# EAGLE board AD 2 (EAGLE 9.6.2)
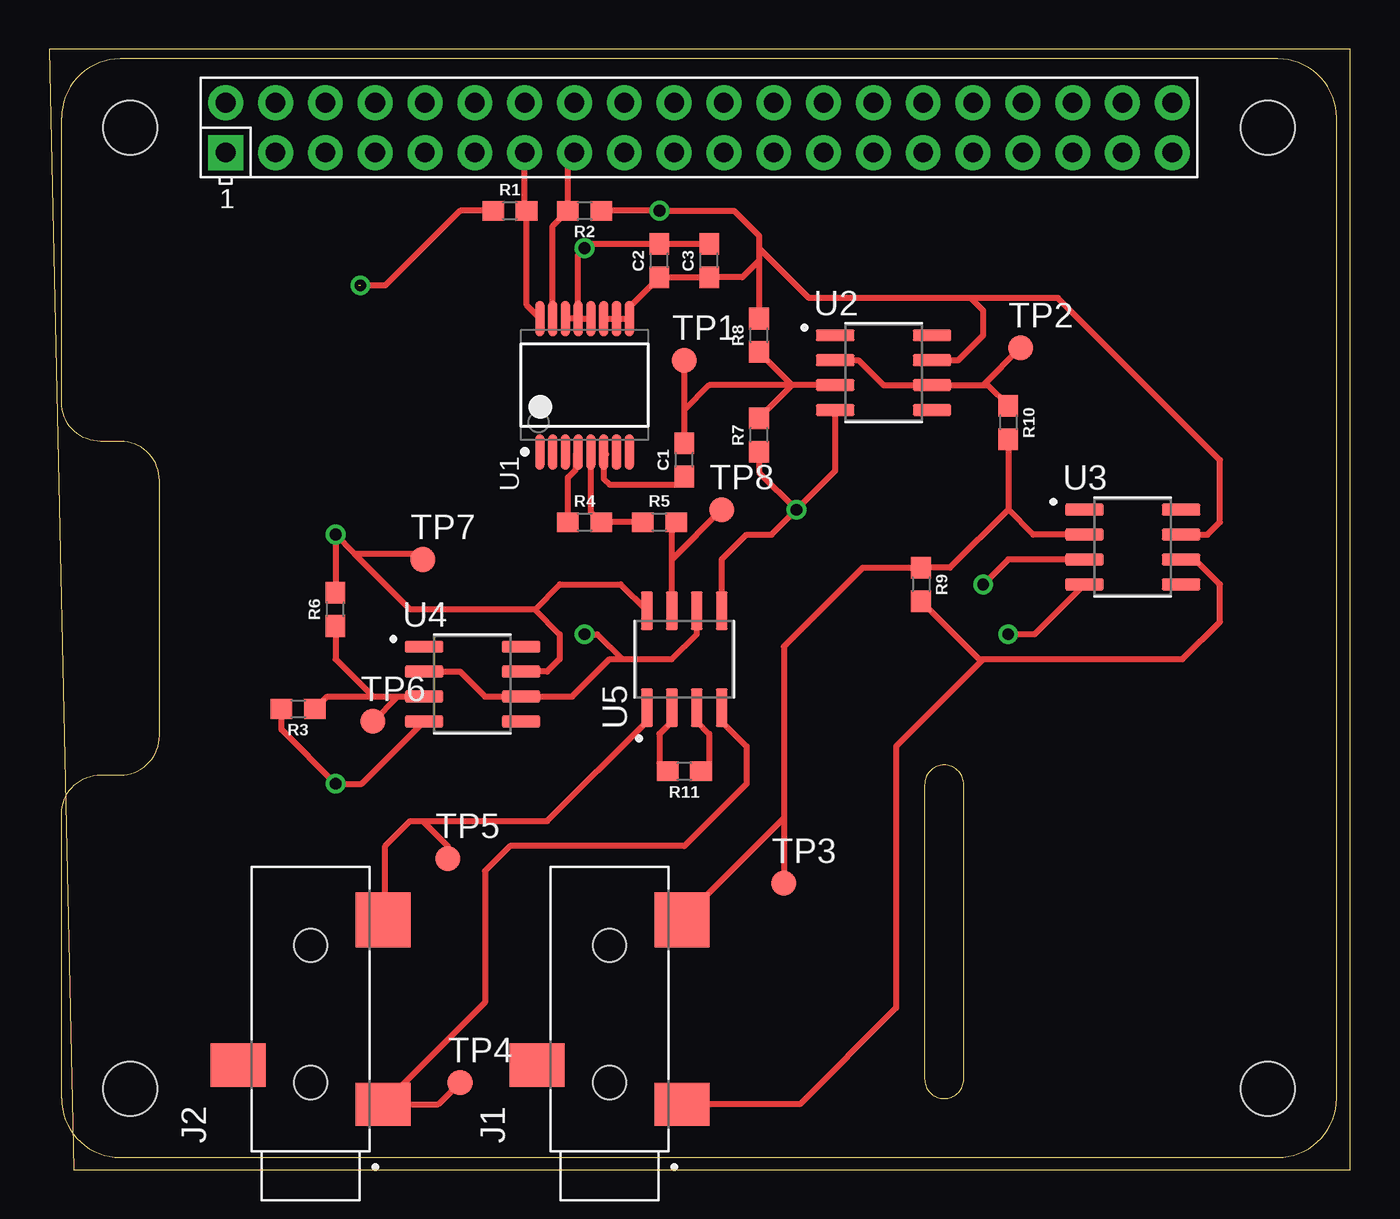
[diagram p0: board, top side]
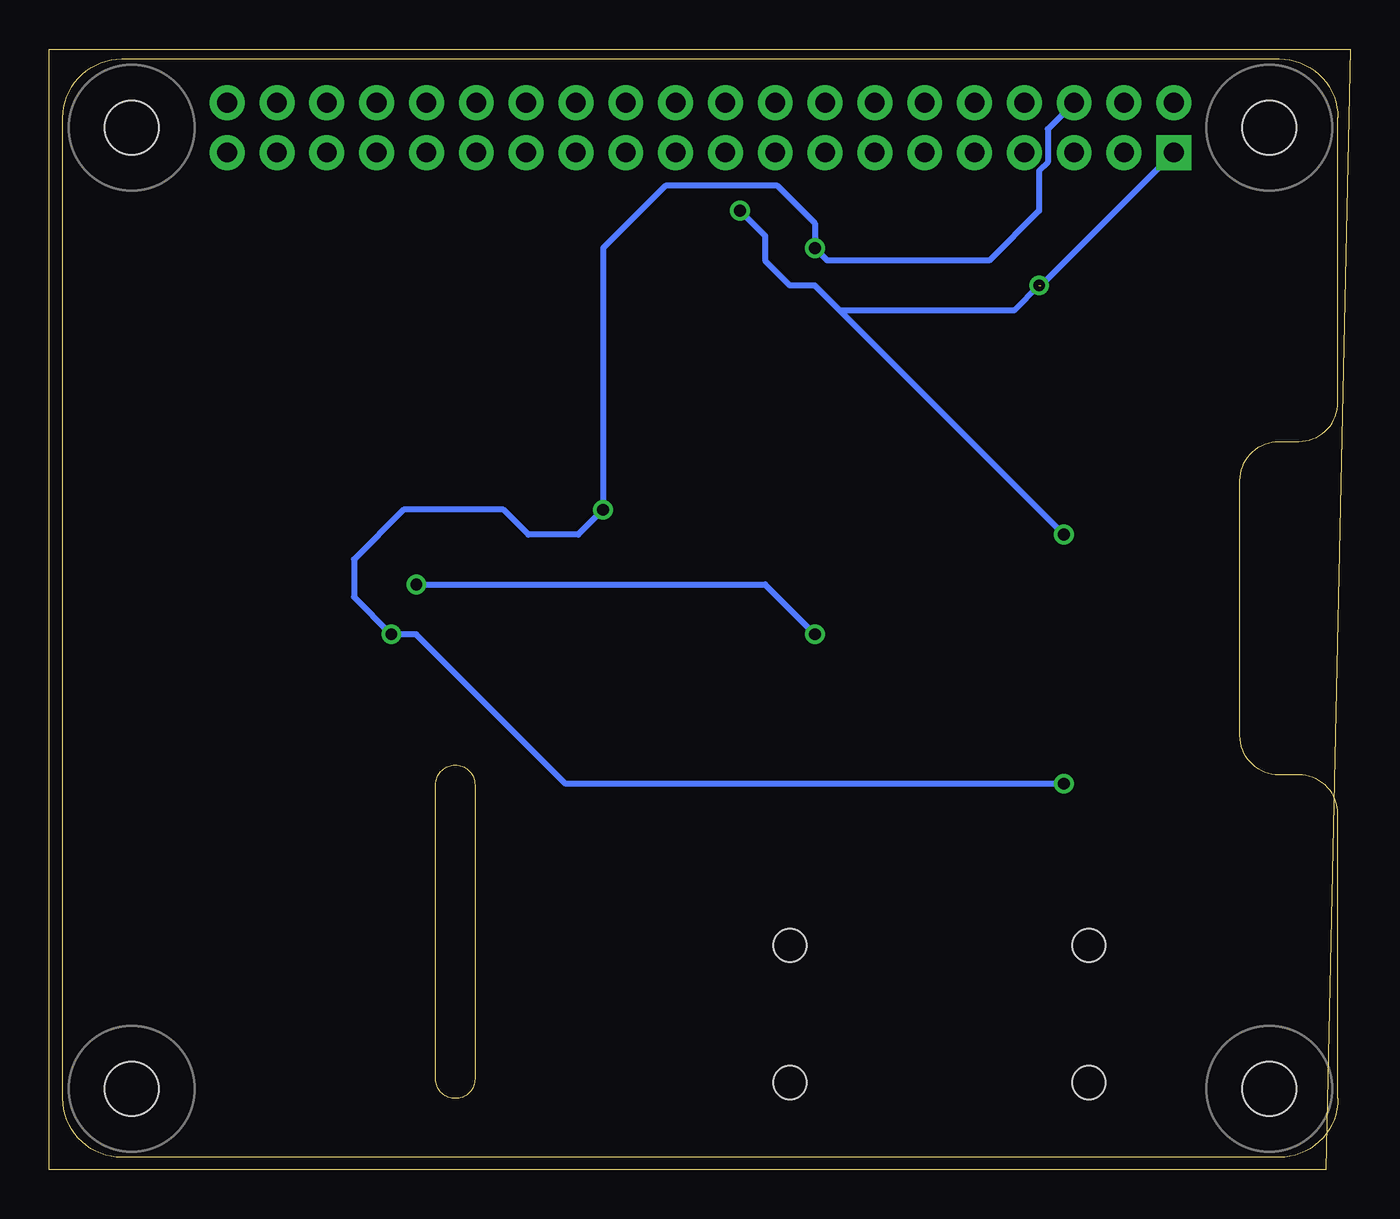
[diagram p1: board, bottom side, seen from below]

Size 66.34 x 57.14 mm. Coordinates in mm from the lower left corner, seen from the top.
Outline: 1.27,0 66.34,0 66.34,57.14 0,57.14 1.27,0
Copper layers (1*16): Top 0.035mm / dielectric 1.5mm / Bottom 0.035mm
Design rules "default": minimum track width 6mil, minimum drill 0.35mm, track to track 6mil, track to pad 6mil, pad to pad 6mil, via to via 6mil, smd to smd 6mil, copper to edge 40mil, drill to drill 6mil, minimum pad ring 10mil, minimum via ring 8mil, stop-mask expansion 4mil, vias tented up to drill 0mil, thermal gap 10mil

## Footprints (pad centres in the part's own frame; a part is rotated, then mirrored left to right if it is on the bottom)
0603 = smd 1.1 x 1: 1 -0.85,0; 2 0.85,0
CUI_SJ-3523-SMT-TR = smd 2.2 x 2.8: 1 -1.1,-3.7; 3 0.9,3.7 | smd 2.8 x 2.8: 2 8.3,-3.7 | hole 1.7: 0,0; 7,0
B1,27 = smd 1.27 x 1.27: TP 0,0
ANALOG_DEVICES_AD5933YRSZ_0 = smd 1.8 x 0.45: 1 -3.4,2.275; 2 -3.4,1.625; 3 -3.4,0.975; 4 -3.4,0.325; 5 -3.4,-0.325; 6 -3.4,-0.975; 7 -3.4,-1.625; 8 -3.4,-2.275; 9 3.4,-2.275; 10 3.4,-1.625; 11 3.4,-0.975; 12 3.4,-0.325; 13 3.4,0.325; 14 3.4,0.975; 15 3.4,1.625; 16 3.4,2.275
SOIC127P599X175-8N = smd 1.97 x 0.6: 1 -2.47,1.905; 2 -2.47,0.635; 3 -2.47,-0.635; 4 -2.47,-1.905; 5 2.47,-1.905; 6 2.47,-0.635; 7 2.47,0.635; 8 2.47,1.905
RASPI_BOARD_B+HAT_DF_CF = drill 1 pad 1.778 square: 1 8.37,51.23 | drill 1 pad 1.778: 2 8.37,53.77; 3 10.91,51.23; 4 10.91,53.77; 5 13.45,51.23; 6 13.45,53.77; 7 15.99,51.23; 8 15.99,53.77; 9 18.53,51.23; 10 18.53,53.77; 11 21.07,51.23; 12 21.07,53.77; 13 23.61,51.23; 14 23.61,53.77; 15 26.15,51.23; 16 26.15,53.77; 17 28.69,51.23; 18 28.69,53.77; 19 31.23,51.23; 20 31.23,53.77; 21 33.77,51.23; 22 33.77,53.77; 23 36.31,51.23; 24 36.31,53.77; 25 38.85,51.23; 26 38.85,53.77; 27 41.39,51.23; 28 41.39,53.77; 29 43.93,51.23; 30 43.93,53.77; 31 46.47,51.23; 32 46.47,53.77; 33 49.01,51.23; 34 49.01,53.77; 35 51.55,51.23; 36 51.55,53.77; 37 54.09,51.23; 38 54.09,53.77; 39 56.63,51.23; 40 56.63,53.77 | hole 2.75: 3.5,3.5; 3.5,52.5; 61.5,3.5; 61.5,52.5

## Placement (x,y rotation side)
C1  10 nF  [0603]  32.38,36.2 90 top
C2  0.1uF  [0603]  31.12,46.35 90 top
C3  10 uF  [0603]  33.66,46.35 90 top
J1  SJ-3523-SMT-TR  [CUI_SJ-3523-SMT-TR]  28.58,4.45 90 top
J2  SJ-3523-SMT-TR  [CUI_SJ-3523-SMT-TR]  13.34,4.45 90 top
R1  4.7 kO  [0603]  23.49,48.89 0 top
R2  4.7 kO  [0603]  27.3,48.89 180 top
R3  1 kO  [0603]  12.7,23.49 180 top
R4  500 O  [0603]  27.3,33.02 0 top
R5  1 kO  [0603]  31.12,33.02 0 top
R6  1 kO  [0603]  14.61,28.58 90 top
R7  100 kO  [0603]  36.2,37.47 90 top
R8  100 kO  [0603]  36.2,42.55 90 top
R9  1 MO  [0603]  44.45,29.84 270 top
R10  80 kO  [0603]  48.9,38.1 270 top
R11  100 kO  [0603]  32.38,20.32 180 top
TP1  PTR1B1,27  [B1,27]  32.38,41.27 0 top
TP2  PTR1B1,27  [B1,27]  49.53,41.91 0 top
TP3  PTR1B1,27  [B1,27]  37.47,14.61 0 top
TP4  PTR1B1,27  [B1,27]  20.95,4.45 0 top
TP5  PTR1B1,27  [B1,27]  20.32,15.88 0 top
TP6  PTR1B1,27  [B1,27]  16.51,22.86 0 top
TP7  PTR1B1,27  [B1,27]  19.05,31.12 0 top
TP8  PTR1B1,27  [B1,27]  34.29,33.66 0 top
U1  ANALOG_DEVICES_AD5933YRSZANALOG_DEVICES_AD5933YRSZ_0_0  [ANALOG_DEVICES_AD5933YRSZ_0]  27.3,40.01 90 top
U2  OPA330AID  [SOIC127P599X175-8N]  42.55,40.64 0 top
U3  OPA330AID  [SOIC127P599X175-8N]  55.24,31.75 0 top
U4  OPA330AID  [SOIC127P599X175-8N]  21.59,24.77 0 top
U5  INA826AID  [SOIC127P599X175-8N]  32.38,26.03 90 top
X1  RASPI_BOARD_B+_HDC  [RASPI_BOARD_B+HAT_DF_CF]  0.64,0.64 0 top

## Library data of the parts
C1 = SparkFun-Capacitors; PROD_ID: CAP-09633
C2 C3 = SparkFun-Capacitors; PROD_ID: CAP-00810
J1 J2 = SJ-3523-SMT-TR; AVAILABILITY: In Stock; CUI_PURCHASE_URL: https://www.cuidevices.com/product/interconnect/connectors/audio-connectors/jacks/sj-352x-smt-series?utm_source=snapeda.com&utm_medium=referral&utm_campaign=snapedaBOM; DESCRIPTION: 3.5 mm, Stereo, Right Angle, Surface Mount (SMT), 3 Conductors, 0~1 Internal Switches, Audio Jack Connector; MF: CUI Devices; MP: SJ-3523-SMT-TR; PACKAGE: None; PRICE: None; PURCHASE-URL: https://pricing.snapeda.com/search/part/SJ-3523-SMT-TR/?ref=eda
R1-R11 = SparkFun-Resistors; PROD_ID: RES-08283
TP1-TP8 = testpad
U1 = Analog Devices - AD5933YRSZ; CIIVA_IDS: 19299999; CODE__JEDEC: MO-150-AC; COMPONENT_LINK_1_DESCRIPTION: Manufacturer URL; COMPONENT_LINK_1_URL: www.analog.com; COMPONENT_LINK_3_DESCRIPTION: Package Specification; COMPONENT_LINK_3_URL: http://www.analog.com/static/imported-files/packages/31572257652246RS_16.pdf; DATASHEET: http://www.analog.com/static/imported-files/data_sheets/AD5933.pdf; DATASHEET_VERSION: Rev. D; FOOTPRINT_VARIANT_NAME_0: Level C; FOOTPRINT_VARIANT_NAME_1: Level B; FOOTPRINT_VARIANT_NAME_2: Level A; IMPORTED: yes; IMPORTED_FROM: vault; IMPORT_TS: 1521848033; IO_INTERFACE: Serial; I_SUPPLY_TOTAL_MAX: 15mA; MASTER_FCLK: 16.776MHz; MF: Analog Devices; MPN: AD5933YRSZ; PACKAGE: RS-16; PACKAGE_DESCRIPTION: 16-Lead Shrink Small Outline Package [SSOP]; PACKAGE_VERSION: 3/17/2005; PIN_0_0_15_INSIDE_EDGE: clock; PIN_0_0_7_INSIDE_EDGE: clock; PREFIX: U; RELEASE_DATE: 1333437714; RESOLUTION_BITS: 12bit; TUNING_WORD_WIDTH_BITS: 27bit; VAULT_GUID: 12E548FF-7E75-4596-9B3A-06B167E4919E; VAULT_REVISION: 0B288880-7FBC-46A2-8187-17CED40A7223
U2-U4 = OPA330AID; AVAILABILITY: In Stock; DESCRIPTION: Single, 1.8-V, 35-µA, micropower, precision, zero drift CMOS op amp; MF: Texas Instruments; MP: OPA330AID; PACKAGE: SOIC-8 Texas Instruments; PRICE: None; PURCHASE-URL: https://pricing.snapeda.com/search/part/OPA330AID/?ref=eda
U5 = INA826AID; AVAILABILITY: In Stock; DESCRIPTION: Precision, 200-μA Supply Current, 36-V Supply Instrumentation Amplifier; MF: Texas Instruments; MP: INA826AID; PACKAGE: SOIC-8 Texas Instruments; PRICE: None; PURCHASE-URL: https://pricing.snapeda.com/search/part/INA826AID/?ref=eda
X1 = raspberrypi_bastelstube_v13

## Nets
3.3V: C2.1 C3.1 R1.1 R2.1 R6.2 R8.2 TP7.TP U1.9 U1.10 U1.11 U2.7 U3.7 U4.7 U5.8 X1.1
5V0: X1.2
GND: C2.2 C3.2 R3.2 R7.1 U1.12 U1.13 U1.14 U2.4 U3.4 U4.4 U5.5 X1.6
N$1: R11.2 U5.2
N$2: R11.1 U5.3
N$3: C1.1 U1.6
N$4: C1.2 R7.2 R8.1 TP1.TP U2.3
N$5: R10.1 TP2.TP U2.2 U2.6
N$6: J1.2 R9.1 R10.2 TP3.TP U3.2
N$7: J1.1 R9.2 U3.6
N$8: R3.1 R6.1 TP6.TP U4.3
N$9: J2.1 TP4.TP U5.4
N$10: U3.3 U4.2 U4.6 U5.6
N$11: J2.2 TP5.TP U5.1
N$12: R5.2 TP8.TP U5.7
N$14: R4.1 U1.4
SCL: R1.2 U1.16 X1.13
SDA: R2.2 U1.15 X1.15
SIGIN: R4.2 R5.1 U1.5

## Tracks (layer width: path | path; a pad name or v marks a point on that pad's centre or on a via)
3.3V  (via drill 0.6)  (1 unrouted)
  Top 0.305: U1.11 U1.10 U1.9 29.58,43.97 C2.1 C3.1 35.34,45.51 36.2,46.35 | 36.2,46.99 36.2,47.62 34.93,48.89 v31.12,48.89 R2.1 | 36.2,46.99 36.2,46.35 | U2.7 46.35,41.27 47.63,42.55 47.63,43.81 46.99,44.45 | 36.2,46.99 38.73,44.45 46.99,44.45 | 36.2,46.35 R8.2 | U3.7 59.05,32.38 59.69,33.02 59.69,36.2 51.43,44.45 46.99,44.45 | R6.2 v14.61,32.38 15.56,31.43 | U4.7 25.4,25.4 26.04,26.03 26.04,27.3 24.77,28.58 | 24.77,28.58 26.04,29.84 29.14,29.84 U5.8 | 15.56,31.43 18.41,28.58 24.77,28.58 | R1.1 20.95,48.89 17.15,45.09 v15.88,45.09 | 15.56,31.43 18.73,31.43 TP7.TP
  Bottom 0.305: v31.12,48.89 29.84,47.62 29.84,46.35 28.58,45.09 27.3,45.09 26.04,43.81 | 15.79,45.09 X1.1 | v14.61,32.38 26.04,43.81 | v15.88,45.09 17.15,43.81 26.04,43.81
GND  (via drill 0.6)
  Top 0.305: U1.13 U1.14 | U1.13 U1.12 | C3.2 C2.2 27.52,47.2 v27.3,46.99 26.98,46.66 U1.13 | R3.2 11.85,22.44 v14.61,19.69 15.95,19.69 U4.4 | R7.1 36.2,35.56 v38.1,33.66 | U2.4 40.08,35.63 v38.1,33.66 | U5.5 34.29,31.12 35.56,32.38 36.83,32.38 v38.1,33.66 | U3.4 50.24,27.3 v48.9,27.3
  Bottom 0.305: X1.6 15.43,53.06 15.43,51.37 15.88,50.93 15.88,48.89 18.41,46.35 26.67,46.35 v27.3,46.99 27.3,48.26 29.21,50.17 34.93,50.17 38.1,46.99 v38.1,33.66 39.37,32.38 41.91,32.38 43.18,33.66 48.26,33.66 50.8,31.12 50.8,29.21 v48.9,27.3 47.63,27.3 40.01,19.69 v14.61,19.69
N$1
  Top 0.305: U5.2 31.75,22.86 31.12,22.23 31.12,20.74 R11.2
N$2
  Top 0.305: U5.3 33.02,22.86 33.66,22.23 33.66,20.74 R11.1
N$3
  Top 0.305: 28.4,36.48 U1.6 28.28,35.22 28.58,34.92 31.97,34.92 C1.1
N$4
  Top 0.305: C1.2 32.38,38.73 | 32.38,38.73 33.66,40.01 37.88,40.01 | U2.3 37.88,40.01 | 35.98,38.31 R7.2 37.88,40.01 | R8.1 37.88,40.01 | 32.38,38.73 TP1.TP
N$5
  Top 0.305: U2.2 41.27,41.27 42.55,40.01 U2.6 47.63,40.01 | 47.63,40.01 47.84,40.01 R10.1 | 47.63,40.01 TP2.TP
N$6
  Top 0.305: R10.2 48.9,33.66 | U3.2 50.16,32.38 48.9,33.66 | 48.9,33.66 45.93,30.7 R9.1 41.49,30.7 37.47,26.67 37.47,17.94 | J1.2 37.47,17.94 | 37.47,17.94 TP3.TP
N$7
  Top 0.305: R9.2 47.41,26.03 47.63,26.03 | 47.63,26.03 57.79,26.03 59.69,27.94 59.69,29.84 58.42,31.12 U3.6 | 47.63,26.03 43.18,21.59 43.18,8.25 38.27,3.34 J1.1
N$8
  Top 0.305: R3.1 14.19,24.13 16.51,24.13 | 16.51,24.13 17.78,24.13 | 17.78,24.13 U4.3 | R6.1 14.61,26.03 16.51,24.13 | TP6.TP 17.78,24.13
N$9
  Top 0.305: U5.4 34.29,22.86 35.56,21.59 35.56,19.69 32.38,16.51 23.49,16.51 22.23,15.24 22.23,8.54 J2.1 19.86,3.34 TP4.TP
N$10  (via drill 0.6)
  Top 0.305: U4.2 20.95,25.4 22.23,24.13 U4.6 26.67,24.13 28.58,26.03 29.21,26.03 | 29.21,26.03 31.75,26.03 33.02,27.3 U5.6 | v47.63,29.84 48.9,31.12 U3.3 | v27.3,27.3 27.94,27.3 29.21,26.03
  Bottom 0.305: v27.3,27.3 29.84,29.84 v47.63,29.84
N$11
  Top 0.305: J2.2 17.15,12.86 17.15,16.51 18.41,17.78 19.05,17.78 | 19.05,17.78 25.4,17.78 30.48,22.86 U5.1 | 19.05,17.78 20.32,16.51 TP5.TP
N$12
  Top 0.305: U5.7 31.75,31.12 | 31.75,31.12 31.75,32.8 R5.2 | 31.75,31.12 TP8.TP
N$14
  Top 0.305: U1.4 26.86,36.48 26.86,35.71 26.45,35.31 R4.1
SCL
  Top 0.305: U1.16 24.34,44.09 R1.2 24.24,49 X1.13
SDA
  Top 0.305: U1.15 25.68,48.12 R2.2 26.45,51.53 X1.15
SIGIN
  Top 0.305: R5.1 R4.2 27.63,33.55 U1.5